# EAGLE board LilyPad-E-Sewing-Kit-Panel_v13_old (EAGLE 7.7.0), part 1 of 2
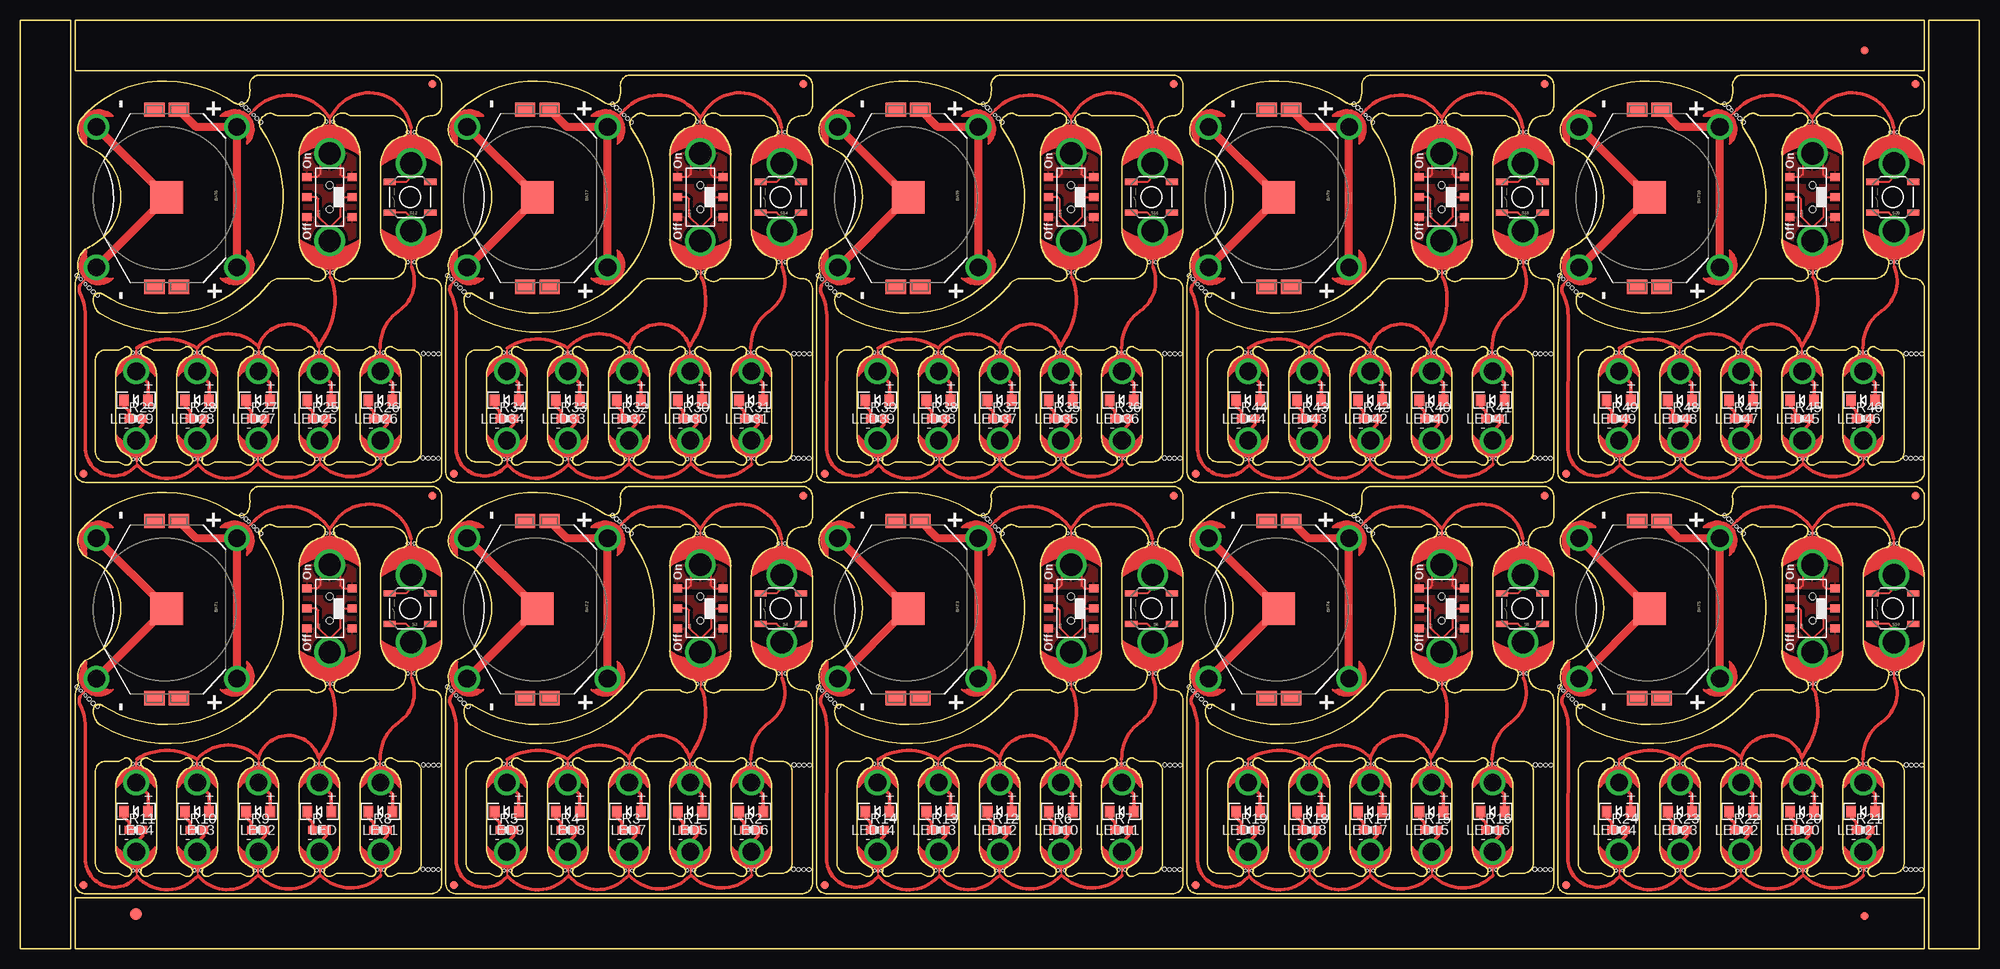
[diagram p0: board, top side]
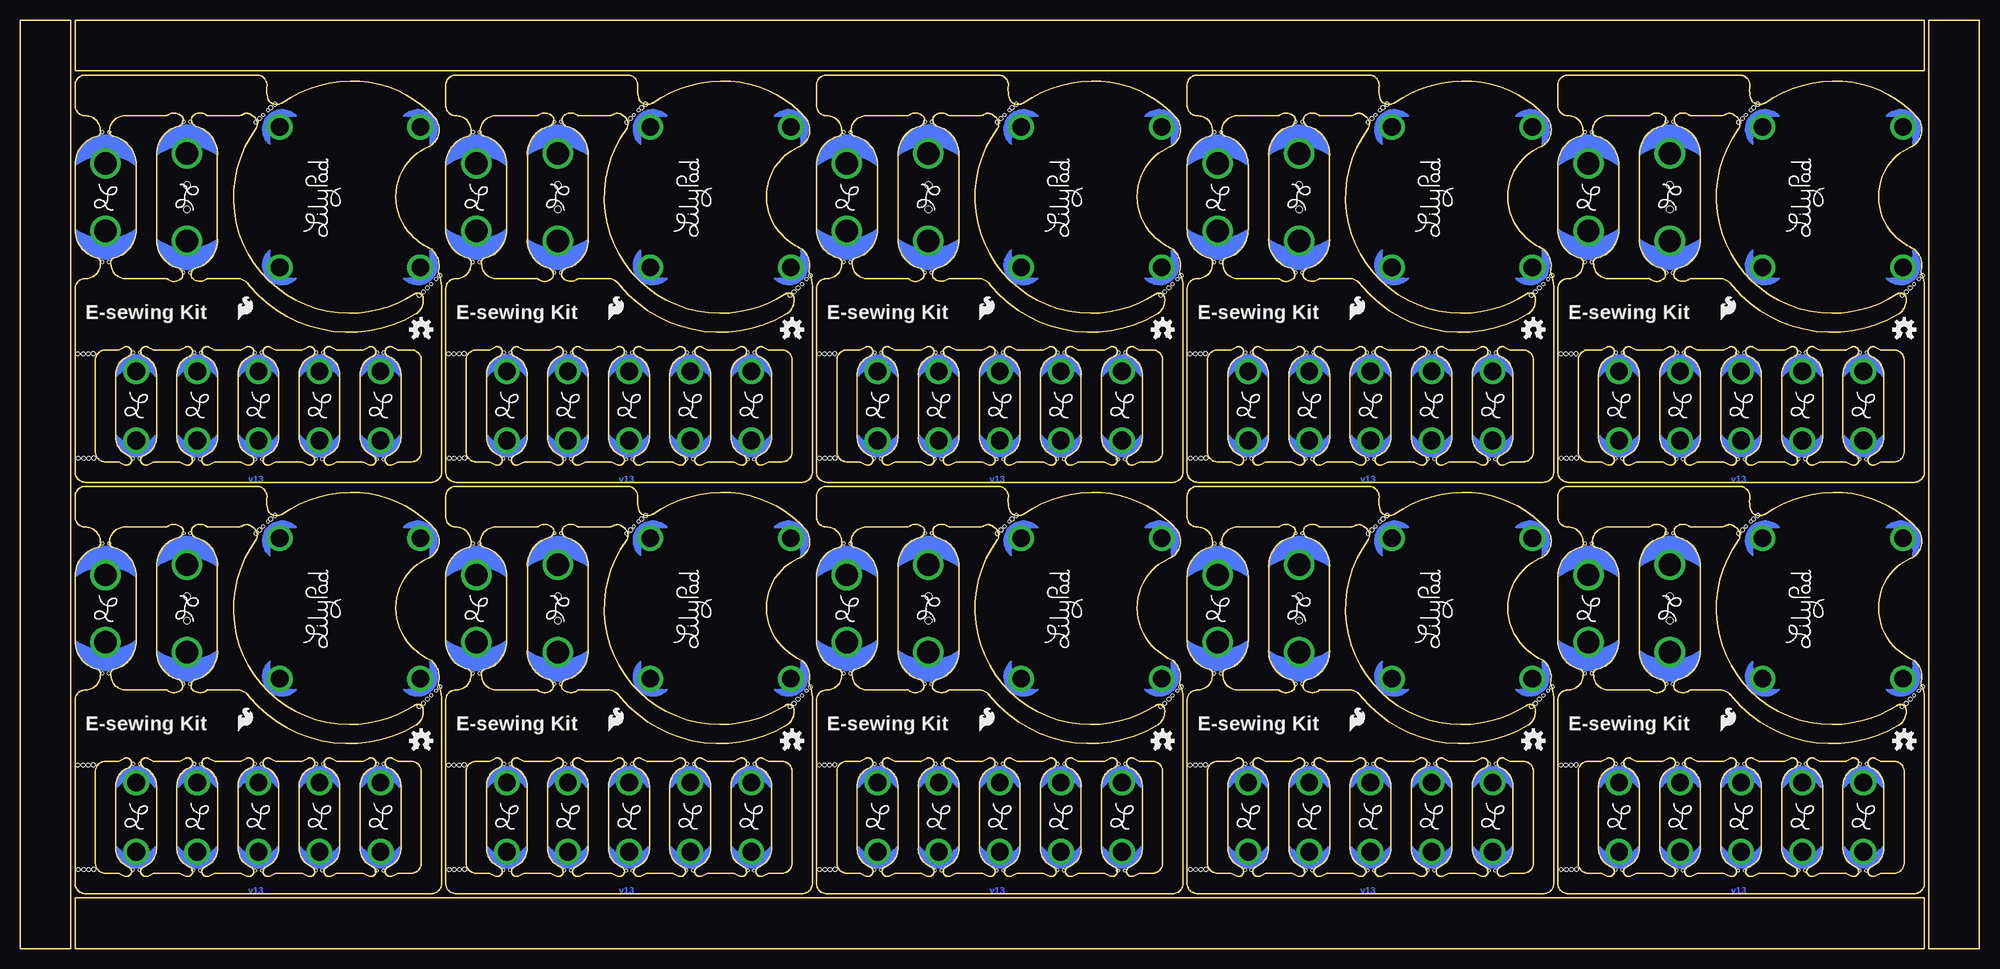
[diagram p1: board, bottom side, seen from below]

Size 244.35 x 115.82 mm. Coordinates in mm from the lower left corner, seen from the top.
Outline: 2613 segments
Copper layers (1*16): Top 0.035mm / dielectric 1.5mm / Bottom 0.035mm
Design rules "SparkFun *": minimum track width 6mil, minimum drill 15mil, track to track 8mil, track to pad 8mil, pad to pad 8mil, via to via 8mil, smd to smd 8mil, copper to edge 10mil, drill to drill 8mil, minimum pad ring 12mil, minimum via ring 10mil, stop-mask expansion 4mil, vias tented up to drill 20mil, thermal gap 10mil
Net classes: 1 VCC: width 0.203 mm
Holes 0.51 mm at 8.64,31.11 9.14,30.61 9.65,30.23 7.11,32.64 28.17,53.6 27.66,54.04 29.55,52.24 30,51.78 50.24,9.88 50.88,9.86 51.51,9.86 52.17,9.86 50.29,22.91 50.93,22.89 51.56,22.89 52.22,22.89 54.86,31.11 55.37,30.61 55.88,30.23 53.34,32.64 74.4,53.6 73.88,54.04 75.77,52.24 76.23,51.78 96.47,9.88 97.1,9.86 97.74,9.86 98.4,9.86 96.52,22.91 97.16,22.89 97.79,22.89 98.45,22.89 101.09,31.11 101.6,30.61 102.11,30.23 99.57,32.64 120.62,53.6 120.11,54.04 122,52.24 122.46,51.78 142.7,9.88 143.33,9.86 143.97,9.86 144.63,9.86 142.75,22.91 143.38,22.89 144.02,22.89 144.68,22.89 147.32,31.11 147.83,30.61 148.34,30.23 145.8,32.64 166.85,53.6 166.34,54.04 168.23,52.24 168.68,51.78 188.93,9.88 189.56,9.86 190.2,9.86 190.86,9.86 188.98,22.91 189.61,22.89 190.25,22.89 190.91,22.89 193.55,31.11 194.06,30.61 194.56,30.23 192.02,32.64 213.08,53.6 212.57,54.04 214.46,52.24 214.91,51.78 235.15,9.88 235.79,9.86 236.42,9.86 237.08,9.86 235.2,22.91 235.84,22.89 236.47,22.89 237.13,22.89 8.64,82.42 9.14,81.92 9.65,81.53 7.11,83.95 28.17,104.91 27.66,105.35 29.55,103.54 30,103.09 50.24,61.19 50.88,61.16 51.51,61.16 52.17,61.16 50.29,74.22 50.93,74.19 51.56,74.19 52.22,74.19 54.86,82.42 55.37,81.92 55.88,81.53 53.34,83.95 74.4,104.91 73.88,105.35 75.77,103.54 76.23,103.09 96.47,61.19 97.1,61.16 97.74,61.16 98.4,61.16 96.52,74.22 97.16,74.19 97.79,74.19 98.45,74.19 101.09,82.42 101.6,81.92 102.11,81.53 99.57,83.95 120.62,104.91 120.11,105.35 122,103.54 122.46,103.09 142.7,61.19 143.33,61.16 143.97,61.16 144.63,61.16 142.75,74.22 143.38,74.19 144.02,74.19 144.68,74.19 147.32,82.42 147.83,81.92 148.34,81.53 145.8,83.95 166.85,104.91 166.34,105.35 168.23,103.54 168.68,103.09 188.93,61.19 189.56,61.16 190.2,61.16 190.86,61.16 188.98,74.22 189.61,74.19 190.25,74.19 190.91,74.19 193.55,82.42 194.06,81.92 194.56,81.53 192.02,83.95 213.08,104.91 212.57,105.35 214.46,103.54 214.91,103.09 235.15,61.19 235.79,61.16 236.42,61.16 237.08,61.16 235.2,74.22 235.84,74.19 236.47,74.19 237.13,74.19

## Footprints (pad centres in the part's own frame; a part is rotated, then mirrored left to right if it is on the bottom)
BATTCON_20MM_4LEGS = smd 1.778 x 2.54: 1 -10.922,1.524; 3 11.176,1.524; P$1 -10.922,-1.524; P$2 11.176,-1.524 | smd 4.064 x 4.064: 2 0,0
PETAL-MEDIUM-2SIDE = drill 2.794: 1 0,-0.254
FIDUCIAL-1X2 = smd 1 x 1: 1 0,0
FIDUCIAL-1.5X3 = smd 1.5 x 1.5: 1 0,0
LED-1206 = smd 1.2 x 1.4: A -1.5,0; C 1.5,0
PETAL-SMALL-2SIDE = drill 2.2: 1 0,0
0603-RES = smd 1.1 x 1: 1 -0.85,0; 2 0.85,0
AYZ0202 = smd 1 x 1.15: 1 -2.5,2.825; 2 0,2.825; 3 2.5,2.825; 4 -2.5,-2.825; 5 0,-2.825; 6 2.5,-2.825 | hole 0.85: 1.5,0; -1.5,0
TACTILE_SWITCH_SMD = smd 1.524 x 0.762: 1 -2.54,1.905; 2 2.54,1.905; 3 -2.54,-1.905; 4 2.54,-1.905
MOUST-BITE-1-(2_HOLES) = smd 0.203 x 0.508 bottom: P$1 -0.013,0 | hole 0.381: -0.432,0; 0.406,0

## Placement (x,y rotation side)
BAT1  [BATTCON_20MM_4LEGS]  18.29,42.42 270 top
BAT2  [BATTCON_20MM_4LEGS]  64.52,42.42 270 top
BAT3  [BATTCON_20MM_4LEGS]  110.74,42.42 270 top
BAT4  [BATTCON_20MM_4LEGS]  156.97,42.42 270 top
BAT5  [BATTCON_20MM_4LEGS]  203.2,42.42 270 top
BAT6  [BATTCON_20MM_4LEGS]  18.29,93.73 270 top
BAT7  [BATTCON_20MM_4LEGS]  64.52,93.73 270 top
BAT8  [BATTCON_20MM_4LEGS]  110.74,93.73 270 top
BAT9  [BATTCON_20MM_4LEGS]  156.97,93.73 270 top
BAT10  [BATTCON_20MM_4LEGS]  203.2,93.73 270 top
BUTTON-  SEWTAP8  [PETAL-MEDIUM-2SIDE]  48.77,46.35 180 top
BUTTON-1  SEWTAP8  [PETAL-MEDIUM-2SIDE]  95,46.35 180 top
BUTTON-2  SEWTAP8  [PETAL-MEDIUM-2SIDE]  141.22,46.35 180 top
BUTTON-3  SEWTAP8  [PETAL-MEDIUM-2SIDE]  187.45,46.35 180 top
BUTTON-4  SEWTAP8  [PETAL-MEDIUM-2SIDE]  233.68,46.35 180 top
BUTTON-5  SEWTAP8  [PETAL-MEDIUM-2SIDE]  48.77,97.66 180 top
BUTTON-6  SEWTAP8  [PETAL-MEDIUM-2SIDE]  95,97.66 180 top
BUTTON-7  SEWTAP8  [PETAL-MEDIUM-2SIDE]  141.22,97.66 180 top
BUTTON-8  SEWTAP8  [PETAL-MEDIUM-2SIDE]  187.45,97.66 180 top
BUTTON-9  SEWTAP8  [PETAL-MEDIUM-2SIDE]  233.68,97.66 180 top
BUTTONS  SEWTAP8  [PETAL-MEDIUM-2SIDE]  48.77,38.48 0 top
BUTTONS1  SEWTAP8  [PETAL-MEDIUM-2SIDE]  95,38.48 0 top
BUTTONS2  SEWTAP8  [PETAL-MEDIUM-2SIDE]  141.22,38.48 0 top
BUTTONS3  SEWTAP8  [PETAL-MEDIUM-2SIDE]  187.45,38.48 0 top
BUTTONS4  SEWTAP8  [PETAL-MEDIUM-2SIDE]  233.68,38.48 0 top
BUTTONS5  SEWTAP8  [PETAL-MEDIUM-2SIDE]  48.77,89.79 0 top
BUTTONS6  SEWTAP8  [PETAL-MEDIUM-2SIDE]  95,89.79 0 top
BUTTONS7  SEWTAP8  [PETAL-MEDIUM-2SIDE]  141.22,89.79 0 top
BUTTONS8  SEWTAP8  [PETAL-MEDIUM-2SIDE]  187.45,89.79 0 top
BUTTONS9  SEWTAP8  [PETAL-MEDIUM-2SIDE]  233.68,89.79 0 top
E$1  [FIDUCIAL-1X2]  230,112.01 0 top
E$2  [FIDUCIAL-1.5X3]  14.48,4.32 0 top
E$8  [FIDUCIAL-1X2]  230,4.06 0 top
JP1  FIDUCIAL1X2  [FIDUCIAL-1X2]  51.44,56.52 0 top
JP2  LOGO-SFESK  [SFE-LOGO-FLAME]  32.26,27.18 0 bottom
JP3  FIDUCIAL1X2  [FIDUCIAL-1X2]  54.13,7.92 0 top
JP4  FIDUCIAL1X2  [FIDUCIAL-1X2]  7.9,7.92 0 top
JP5  FIDUCIAL1X2  [FIDUCIAL-1X2]  97.66,56.52 0 top
JP6  LOGO-SFESK  [SFE-LOGO-FLAME]  78.49,27.18 0 bottom
JP7  FIDUCIAL1X2  [FIDUCIAL-1X2]  100.36,7.92 0 top
JP8  FIDUCIAL1X2  [FIDUCIAL-1X2]  143.89,56.52 0 top
JP9  LOGO-SFESK  [SFE-LOGO-FLAME]  124.71,27.18 0 bottom
JP10  FIDUCIAL1X2  [FIDUCIAL-1X2]  146.58,7.92 0 top
JP11  FIDUCIAL1X2  [FIDUCIAL-1X2]  190.12,56.52 0 top
JP12  LOGO-SFESK  [SFE-LOGO-FLAME]  170.94,27.18 0 bottom
JP13  FIDUCIAL1X2  [FIDUCIAL-1X2]  192.81,7.92 0 top
JP14  FIDUCIAL1X2  [FIDUCIAL-1X2]  236.35,56.52 0 top
JP15  LOGO-SFESK  [SFE-LOGO-FLAME]  217.17,27.18 0 bottom
JP16  FIDUCIAL1X2  [FIDUCIAL-1X2]  7.9,59.23 0 top
JP17  FIDUCIAL1X2  [FIDUCIAL-1X2]  51.44,107.82 0 top
JP18  LOGO-SFESK  [SFE-LOGO-FLAME]  32.26,78.49 0 bottom
JP19  FIDUCIAL1X2  [FIDUCIAL-1X2]  54.13,59.23 0 top
JP20  FIDUCIAL1X2  [FIDUCIAL-1X2]  97.66,107.82 0 top
JP21  LOGO-SFESK  [SFE-LOGO-FLAME]  78.49,78.49 0 bottom
JP22  FIDUCIAL1X2  [FIDUCIAL-1X2]  100.36,59.23 0 top
JP23  FIDUCIAL1X2  [FIDUCIAL-1X2]  143.89,107.82 0 top
JP24  LOGO-SFESK  [SFE-LOGO-FLAME]  124.71,78.49 0 bottom
JP25  FIDUCIAL1X2  [FIDUCIAL-1X2]  146.58,59.23 0 top
JP26  FIDUCIAL1X2  [FIDUCIAL-1X2]  190.12,107.82 0 top
JP27  LOGO-SFESK  [SFE-LOGO-FLAME]  170.94,78.49 0 bottom
JP28  FIDUCIAL1X2  [FIDUCIAL-1X2]  192.81,59.23 0 top
JP29  FIDUCIAL1X2  [FIDUCIAL-1X2]  236.35,107.82 0 top
JP30  LOGO-SFESK  [SFE-LOGO-FLAME]  217.17,78.49 0 bottom
LED  White  [LED-1206]  37.32,17.09 180 top
LED1  White  [LED-1206]  44.94,17.09 180 top
LED2  White  [LED-1206]  29.7,17.09 180 top
LED3  White  [LED-1206]  22.08,17.09 180 top
LED4  White  [LED-1206]  14.46,17.09 180 top
LED5  White  [LED-1206]  83.55,17.09 180 top
LED6  White  [LED-1206]  91.17,17.09 180 top
LED7  White  [LED-1206]  75.93,17.09 180 top
LED8  White  [LED-1206]  68.31,17.09 180 top
LED9  White  [LED-1206]  60.69,17.09 180 top
LED10  White  [LED-1206]  129.77,17.09 180 top
LED11  White  [LED-1206]  137.39,17.09 180 top
LED12  White  [LED-1206]  122.15,17.09 180 top
LED13  White  [LED-1206]  114.53,17.09 180 top
LED14  White  [LED-1206]  106.91,17.09 180 top
LED15  White  [LED-1206]  176,17.09 180 top
LED16  White  [LED-1206]  183.62,17.09 180 top
LED17  White  [LED-1206]  168.38,17.09 180 top
LED18  White  [LED-1206]  160.76,17.09 180 top
LED19  White  [LED-1206]  153.14,17.09 180 top
LED20  White  [LED-1206]  222.23,17.09 180 top
LED21  White  [LED-1206]  229.85,17.09 180 top
LED22  White  [LED-1206]  214.61,17.09 180 top
LED23  White  [LED-1206]  206.99,17.09 180 top
LED24  White  [LED-1206]  199.37,17.09 180 top
LED25  White  [LED-1206]  37.32,68.4 180 top
LED26  White  [LED-1206]  44.94,68.4 180 top
LED27  White  [LED-1206]  29.7,68.4 180 top
LED28  White  [LED-1206]  22.08,68.4 180 top
LED29  White  [LED-1206]  14.46,68.4 180 top
LED30  White  [LED-1206]  83.55,68.4 180 top
LED31  White  [LED-1206]  91.17,68.4 180 top
LED32  White  [LED-1206]  75.93,68.4 180 top
LED33  White  [LED-1206]  68.31,68.4 180 top
LED34  White  [LED-1206]  60.69,68.4 180 top
LED35  White  [LED-1206]  129.77,68.4 180 top
LED36  White  [LED-1206]  137.39,68.4 180 top
LED37  White  [LED-1206]  122.15,68.4 180 top
LED38  White  [LED-1206]  114.53,68.4 180 top
LED39  White  [LED-1206]  106.91,68.4 180 top
LED40  White  [LED-1206]  176,68.4 180 top
LED41  White  [LED-1206]  183.62,68.4 180 top
LED42  White  [LED-1206]  168.38,68.4 180 top
LED43  White  [LED-1206]  160.76,68.4 180 top
LED44  White  [LED-1206]  153.14,68.4 180 top
LED45  White  [LED-1206]  222.23,68.4 180 top
LED46  White  [LED-1206]  229.85,68.4 180 top
LED47  White  [LED-1206]  214.61,68.4 180 top
LED48  White  [LED-1206]  206.99,68.4 180 top
LED49  White  [LED-1206]  199.37,68.4 180 top
LED+  SEWTAP6  [PETAL-SMALL-2SIDE]  37.34,20.7 180 top
LED+1  SEWTAP6  [PETAL-SMALL-2SIDE]  44.96,20.7 180 top
LED+2  SEWTAP6  [PETAL-SMALL-2SIDE]  29.72,20.7 180 top
LED+3  SEWTAP6  [PETAL-SMALL-2SIDE]  22.1,20.7 180 top
LED+4  SEWTAP6  [PETAL-SMALL-2SIDE]  14.48,20.7 180 top
LED+5  SEWTAP6  [PETAL-SMALL-2SIDE]  83.57,20.7 180 top
LED+6  SEWTAP6  [PETAL-SMALL-2SIDE]  91.19,20.7 180 top
LED+7  SEWTAP6  [PETAL-SMALL-2SIDE]  75.95,20.7 180 top
LED+8  SEWTAP6  [PETAL-SMALL-2SIDE]  68.33,20.7 180 top
LED+9  SEWTAP6  [PETAL-SMALL-2SIDE]  60.71,20.7 180 top
LED+10  SEWTAP6  [PETAL-SMALL-2SIDE]  129.79,20.7 180 top
LED+11  SEWTAP6  [PETAL-SMALL-2SIDE]  137.41,20.7 180 top
LED+12  SEWTAP6  [PETAL-SMALL-2SIDE]  122.17,20.7 180 top
LED+13  SEWTAP6  [PETAL-SMALL-2SIDE]  114.55,20.7 180 top
LED+14  SEWTAP6  [PETAL-SMALL-2SIDE]  106.93,20.7 180 top
LED+15  SEWTAP6  [PETAL-SMALL-2SIDE]  176.02,20.7 180 top
LED+16  SEWTAP6  [PETAL-SMALL-2SIDE]  183.64,20.7 180 top
LED+17  SEWTAP6  [PETAL-SMALL-2SIDE]  168.4,20.7 180 top
LED+18  SEWTAP6  [PETAL-SMALL-2SIDE]  160.78,20.7 180 top
LED+19  SEWTAP6  [PETAL-SMALL-2SIDE]  153.16,20.7 180 top
LED+20  SEWTAP6  [PETAL-SMALL-2SIDE]  222.25,20.7 180 top
LED+21  SEWTAP6  [PETAL-SMALL-2SIDE]  229.87,20.7 180 top
LED+22  SEWTAP6  [PETAL-SMALL-2SIDE]  214.63,20.7 180 top
LED+23  SEWTAP6  [PETAL-SMALL-2SIDE]  207.01,20.7 180 top
LED+24  SEWTAP6  [PETAL-SMALL-2SIDE]  199.39,20.7 180 top
LED+25  SEWTAP6  [PETAL-SMALL-2SIDE]  37.34,72.01 180 top
LED+26  SEWTAP6  [PETAL-SMALL-2SIDE]  44.96,72.01 180 top
LED+27  SEWTAP6  [PETAL-SMALL-2SIDE]  29.72,72.01 180 top
LED+28  SEWTAP6  [PETAL-SMALL-2SIDE]  22.1,72.01 180 top
LED+29  SEWTAP6  [PETAL-SMALL-2SIDE]  14.48,72.01 180 top
LED+30  SEWTAP6  [PETAL-SMALL-2SIDE]  83.57,72.01 180 top
LED+31  SEWTAP6  [PETAL-SMALL-2SIDE]  91.19,72.01 180 top
LED+32  SEWTAP6  [PETAL-SMALL-2SIDE]  75.95,72.01 180 top
LED+33  SEWTAP6  [PETAL-SMALL-2SIDE]  68.33,72.01 180 top
LED+34  SEWTAP6  [PETAL-SMALL-2SIDE]  60.71,72.01 180 top
LED+35  SEWTAP6  [PETAL-SMALL-2SIDE]  129.79,72.01 180 top
LED+36  SEWTAP6  [PETAL-SMALL-2SIDE]  137.41,72.01 180 top
LED+37  SEWTAP6  [PETAL-SMALL-2SIDE]  122.17,72.01 180 top
LED+38  SEWTAP6  [PETAL-SMALL-2SIDE]  114.55,72.01 180 top
LED+39  SEWTAP6  [PETAL-SMALL-2SIDE]  106.93,72.01 180 top
LED+40  SEWTAP6  [PETAL-SMALL-2SIDE]  176.02,72.01 180 top
LED+41  SEWTAP6  [PETAL-SMALL-2SIDE]  183.64,72.01 180 top
LED+42  SEWTAP6  [PETAL-SMALL-2SIDE]  168.4,72.01 180 top
LED+43  SEWTAP6  [PETAL-SMALL-2SIDE]  160.78,72.01 180 top
LED+44  SEWTAP6  [PETAL-SMALL-2SIDE]  153.16,72.01 180 top
LED+45  SEWTAP6  [PETAL-SMALL-2SIDE]  222.25,72.01 180 top
LED+46  SEWTAP6  [PETAL-SMALL-2SIDE]  229.87,72.01 180 top
LED+47  SEWTAP6  [PETAL-SMALL-2SIDE]  214.63,72.01 180 top
LED+48  SEWTAP6  [PETAL-SMALL-2SIDE]  207.01,72.01 180 top
LED+49  SEWTAP6  [PETAL-SMALL-2SIDE]  199.39,72.01 180 top
LED-  SEWTAP6  [PETAL-SMALL-2SIDE]  37.34,12.06 0 top
LED-1  SEWTAP6  [PETAL-SMALL-2SIDE]  44.96,12.06 0 top
LED-2  SEWTAP6  [PETAL-SMALL-2SIDE]  29.72,12.06 0 top
LED-3  SEWTAP6  [PETAL-SMALL-2SIDE]  22.1,12.06 0 top
LED-4  SEWTAP6  [PETAL-SMALL-2SIDE]  14.48,12.06 0 top
LED-5  SEWTAP6  [PETAL-SMALL-2SIDE]  83.57,12.06 0 top
LED-6  SEWTAP6  [PETAL-SMALL-2SIDE]  91.19,12.06 0 top
LED-7  SEWTAP6  [PETAL-SMALL-2SIDE]  75.95,12.06 0 top
LED-8  SEWTAP6  [PETAL-SMALL-2SIDE]  68.33,12.06 0 top
LED-9  SEWTAP6  [PETAL-SMALL-2SIDE]  60.71,12.06 0 top
LED-10  SEWTAP6  [PETAL-SMALL-2SIDE]  129.79,12.06 0 top
LED-11  SEWTAP6  [PETAL-SMALL-2SIDE]  137.41,12.06 0 top
LED-12  SEWTAP6  [PETAL-SMALL-2SIDE]  122.17,12.06 0 top
LED-13  SEWTAP6  [PETAL-SMALL-2SIDE]  114.55,12.06 0 top
LED-14  SEWTAP6  [PETAL-SMALL-2SIDE]  106.93,12.06 0 top
LED-15  SEWTAP6  [PETAL-SMALL-2SIDE]  176.02,12.06 0 top
LED-16  SEWTAP6  [PETAL-SMALL-2SIDE]  183.64,12.06 0 top
LED-17  SEWTAP6  [PETAL-SMALL-2SIDE]  168.4,12.06 0 top
LED-18  SEWTAP6  [PETAL-SMALL-2SIDE]  160.78,12.06 0 top
LED-19  SEWTAP6  [PETAL-SMALL-2SIDE]  153.16,12.06 0 top
LED-20  SEWTAP6  [PETAL-SMALL-2SIDE]  222.25,12.06 0 top
LED-21  SEWTAP6  [PETAL-SMALL-2SIDE]  229.87,12.06 0 top
LED-22  SEWTAP6  [PETAL-SMALL-2SIDE]  214.63,12.06 0 top
LED-23  SEWTAP6  [PETAL-SMALL-2SIDE]  207.01,12.06 0 top
LED-24  SEWTAP6  [PETAL-SMALL-2SIDE]  199.39,12.06 0 top
LED-25  SEWTAP6  [PETAL-SMALL-2SIDE]  37.34,63.37 0 top
LED-26  SEWTAP6  [PETAL-SMALL-2SIDE]  44.96,63.37 0 top
LED-27  SEWTAP6  [PETAL-SMALL-2SIDE]  29.72,63.37 0 top
LED-28  SEWTAP6  [PETAL-SMALL-2SIDE]  22.1,63.37 0 top
LED-29  SEWTAP6  [PETAL-SMALL-2SIDE]  14.48,63.37 0 top
LED-30  SEWTAP6  [PETAL-SMALL-2SIDE]  83.57,63.37 0 top
LED-31  SEWTAP6  [PETAL-SMALL-2SIDE]  91.19,63.37 0 top
LED-32  SEWTAP6  [PETAL-SMALL-2SIDE]  75.95,63.37 0 top
LED-33  SEWTAP6  [PETAL-SMALL-2SIDE]  68.33,63.37 0 top
LED-34  SEWTAP6  [PETAL-SMALL-2SIDE]  60.71,63.37 0 top
LED-35  SEWTAP6  [PETAL-SMALL-2SIDE]  129.79,63.37 0 top
LED-36  SEWTAP6  [PETAL-SMALL-2SIDE]  137.41,63.37 0 top
LED-37  SEWTAP6  [PETAL-SMALL-2SIDE]  122.17,63.37 0 top
LED-38  SEWTAP6  [PETAL-SMALL-2SIDE]  114.55,63.37 0 top
LED-39  SEWTAP6  [PETAL-SMALL-2SIDE]  106.93,63.37 0 top
LED-40  SEWTAP6  [PETAL-SMALL-2SIDE]  176.02,63.37 0 top
LED-41  SEWTAP6  [PETAL-SMALL-2SIDE]  183.64,63.37 0 top
LED-42  SEWTAP6  [PETAL-SMALL-2SIDE]  168.4,63.37 0 top
LED-43  SEWTAP6  [PETAL-SMALL-2SIDE]  160.78,63.37 0 top
LED-44  SEWTAP6  [PETAL-SMALL-2SIDE]  153.16,63.37 0 top
LED-45  SEWTAP6  [PETAL-SMALL-2SIDE]  222.25,63.37 0 top
LED-46  SEWTAP6  [PETAL-SMALL-2SIDE]  229.87,63.37 0 top
LED-47  SEWTAP6  [PETAL-SMALL-2SIDE]  214.63,63.37 0 top
LED-48  SEWTAP6  [PETAL-SMALL-2SIDE]  207.01,63.37 0 top
LED-49  SEWTAP6  [PETAL-SMALL-2SIDE]  199.39,63.37 0 top
LOGO1  LOGO-LPL  [LOGO-L]  38.61,42.42 180 bottom
LOGO2  LOGO-LPL  [LOGO-L]  48.77,42.42 0 bottom
LOGO3  LOGO-LPL  [LOGO-L]  29.72,16.51 0 bottom
LOGO4  LOGO-LPL  [LOGO-L]  37.34,16.51 0 bottom
LOGO5  LOGO-LPL  [LOGO-L]  22.1,16.51 0 bottom
LOGO6  LOGO-LPL  [LOGO-L]  14.48,16.51 0 bottom
LOGO7  LOGO-LPL  [LOGO-L]  44.96,16.51 0 bottom
LOGO8  LOGO-LPL  [LOGO-L]  84.84,42.42 180 bottom
LOGO9  LOGO-LPL  [LOGO-L]  95,42.42 0 bottom
LOGO10  LOGO-LPL  [LOGO-L]  75.95,16.51 0 bottom
LOGO11  LOGO-LPL  [LOGO-L]  83.57,16.51 0 bottom
LOGO12  LOGO-LPL  [LOGO-L]  68.33,16.51 0 bottom
LOGO13  LOGO-LPL  [LOGO-L]  60.71,16.51 0 bottom
LOGO14  LOGO-LPL  [LOGO-L]  91.19,16.51 0 bottom
LOGO15  LOGO-LPL  [LOGO-L]  131.06,42.42 180 bottom
LOGO16  LOGO-LPL  [LOGO-L]  141.22,42.42 0 bottom
LOGO17  LOGO-LPL  [LOGO-L]  122.17,16.51 0 bottom
LOGO18  LOGO-LPL  [LOGO-L]  129.79,16.51 0 bottom
LOGO19  LOGO-LPL  [LOGO-L]  114.55,16.51 0 bottom
LOGO20  LOGO-LPL  [LOGO-L]  106.93,16.51 0 bottom
LOGO21  LOGO-LPL  [LOGO-L]  137.41,16.51 0 bottom
LOGO22  LOGO-LPL  [LOGO-L]  177.29,42.42 180 bottom
LOGO23  LOGO-LPL  [LOGO-L]  187.45,42.42 0 bottom
LOGO24  LOGO-LPL  [LOGO-L]  168.4,16.51 0 bottom
LOGO25  LOGO-LPL  [LOGO-L]  176.02,16.51 0 bottom
LOGO26  LOGO-LPL  [LOGO-L]  160.78,16.51 0 bottom
LOGO27  LOGO-LPL  [LOGO-L]  153.16,16.51 0 bottom
LOGO28  LOGO-LPL  [LOGO-L]  183.64,16.51 0 bottom
LOGO29  LOGO-LPL  [LOGO-L]  223.52,42.42 180 bottom
LOGO30  LOGO-LPL  [LOGO-L]  233.68,42.42 0 bottom
LOGO31  LOGO-LPL  [LOGO-L]  214.63,16.51 0 bottom
LOGO32  LOGO-LPL  [LOGO-L]  222.25,16.51 0 bottom
LOGO33  LOGO-LPL  [LOGO-L]  207.01,16.51 0 bottom
LOGO34  LOGO-LPL  [LOGO-L]  199.39,16.51 0 bottom
LOGO35  LOGO-LPL  [LOGO-L]  229.87,16.51 0 bottom
LOGO36  LOGO-LPL  [LOGO-L]  38.61,93.73 180 bottom
LOGO37  LOGO-LPL  [LOGO-L]  48.77,93.73 0 bottom
LOGO38  LOGO-LPL  [LOGO-L]  29.72,67.82 0 bottom
LOGO39  LOGO-LPL  [LOGO-L]  37.34,67.82 0 bottom
LOGO40  LOGO-LPL  [LOGO-L]  22.1,67.82 0 bottom
LOGO41  LOGO-LPL  [LOGO-L]  14.48,67.82 0 bottom
LOGO42  LOGO-LPL  [LOGO-L]  44.96,67.82 0 bottom
LOGO43  LOGO-LPL  [LOGO-L]  84.84,93.73 180 bottom
LOGO44  LOGO-LPL  [LOGO-L]  95,93.73 0 bottom
LOGO45  LOGO-LPL  [LOGO-L]  75.95,67.82 0 bottom
LOGO46  LOGO-LPL  [LOGO-L]  83.57,67.82 0 bottom
LOGO47  LOGO-LPL  [LOGO-L]  68.33,67.82 0 bottom
LOGO48  LOGO-LPL  [LOGO-L]  60.71,67.82 0 bottom
LOGO49  LOGO-LPL  [LOGO-L]  91.19,67.82 0 bottom
LOGO50  LOGO-LPL  [LOGO-L]  131.06,93.73 180 bottom
LOGO51  LOGO-LPL  [LOGO-L]  141.22,93.73 0 bottom
LOGO52  LOGO-LPL  [LOGO-L]  122.17,67.82 0 bottom
LOGO53  LOGO-LPL  [LOGO-L]  129.79,67.82 0 bottom
LOGO54  LOGO-LPL  [LOGO-L]  114.55,67.82 0 bottom
LOGO55  LOGO-LPL  [LOGO-L]  106.93,67.82 0 bottom
LOGO56  LOGO-LPL  [LOGO-L]  137.41,67.82 0 bottom
LOGO57  LOGO-LPL  [LOGO-L]  177.29,93.73 180 bottom
LOGO58  LOGO-LPL  [LOGO-L]  187.45,93.73 0 bottom
LOGO59  LOGO-LPL  [LOGO-L]  168.4,67.82 0 bottom
LOGO60  LOGO-LPL  [LOGO-L]  176.02,67.82 0 bottom
LOGO61  LOGO-LPL  [LOGO-L]  160.78,67.82 0 bottom
LOGO62  LOGO-LPL  [LOGO-L]  153.16,67.82 0 bottom
LOGO63  LOGO-LPL  [LOGO-L]  183.64,67.82 0 bottom
LOGO64  LOGO-LPL  [LOGO-L]  223.52,93.73 180 bottom
LOGO65  LOGO-LPL  [LOGO-L]  233.68,93.73 0 bottom
LOGO66  LOGO-LPL  [LOGO-L]  214.63,67.82 0 bottom
LOGO67  LOGO-LPL  [LOGO-L]  222.25,67.82 0 bottom
LOGO68  LOGO-LPL  [LOGO-L]  207.01,67.82 0 bottom
LOGO69  LOGO-LPL  [LOGO-L]  199.39,67.82 0 bottom
LOGO70  LOGO-LPL  [LOGO-L]  229.87,67.82 0 bottom
R  100  [0603-RES]  37.32,14.81 0 top
R1  100  [0603-RES]  83.55,14.81 0 top
R2  100  [0603-RES]  91.17,14.81 0 top
R3  100  [0603-RES]  75.93,14.81 0 top
R4  100  [0603-RES]  68.31,14.81 0 top
R5  100  [0603-RES]  60.69,14.81 0 top
R6  100  [0603-RES]  129.77,14.81 0 top
R7  100  [0603-RES]  137.39,14.81 0 top
R8  100  [0603-RES]  44.94,14.81 0 top
R9  100  [0603-RES]  29.7,14.81 0 top
R10  100  [0603-RES]  22.08,14.81 0 top
R11  100  [0603-RES]  14.46,14.81 0 top
R12  100  [0603-RES]  122.15,14.81 0 top
R13  100  [0603-RES]  114.53,14.81 0 top
R14  100  [0603-RES]  106.91,14.81 0 top
R15  100  [0603-RES]  176,14.81 0 top
R16  100  [0603-RES]  183.62,14.81 0 top
R17  100  [0603-RES]  168.38,14.81 0 top
R18  100  [0603-RES]  160.76,14.81 0 top
R19  100  [0603-RES]  153.14,14.81 0 top
R20  100  [0603-RES]  222.23,14.81 0 top
R21  100  [0603-RES]  229.85,14.81 0 top
R22  100  [0603-RES]  214.61,14.81 0 top
R23  100  [0603-RES]  206.99,14.81 0 top
R24  100  [0603-RES]  199.37,14.81 0 top
R25  100  [0603-RES]  37.32,66.12 0 top
R26  100  [0603-RES]  44.94,66.12 0 top
R27  100  [0603-RES]  29.7,66.12 0 top
R28  100  [0603-RES]  22.08,66.12 0 top
R29  100  [0603-RES]  14.46,66.12 0 top
R30  100  [0603-RES]  83.55,66.12 0 top
R31  100  [0603-RES]  91.17,66.12 0 top
R32  100  [0603-RES]  75.93,66.12 0 top
R33  100  [0603-RES]  68.31,66.12 0 top
R34  100  [0603-RES]  60.69,66.12 0 top
R35  100  [0603-RES]  129.77,66.12 0 top
R36  100  [0603-RES]  137.39,66.12 0 top
R37  100  [0603-RES]  122.15,66.12 0 top
R38  100  [0603-RES]  114.53,66.12 0 top
R39  100  [0603-RES]  106.91,66.12 0 top
R40  100  [0603-RES]  176,66.12 0 top
R41  100  [0603-RES]  183.62,66.12 0 top
R42  100  [0603-RES]  168.38,66.12 0 top
R43  100  [0603-RES]  160.76,66.12 0 top
R44  100  [0603-RES]  153.14,66.12 0 top
R45  100  [0603-RES]  222.23,66.12 0 top
R46  100  [0603-RES]  229.85,66.12 0 top
R47  100  [0603-RES]  214.61,66.12 0 top
R48  100  [0603-RES]  206.99,66.12 0 top
R49  100  [0603-RES]  199.37,66.12 0 top
S1  AYZ0202  [AYZ0202]  84.84,42.42 90 top
S2  AYZ0202  [AYZ0202]  38.61,42.42 90 top
S3  [TACTILE_SWITCH_SMD]  48.64,42.42 180 top
S4  [TACTILE_SWITCH_SMD]  94.87,42.42 180 top
S5  AYZ0202  [AYZ0202]  131.06,42.42 90 top
S6  [TACTILE_SWITCH_SMD]  141.1,42.42 180 top
S7  AYZ0202  [AYZ0202]  177.29,42.42 90 top
S8  [TACTILE_SWITCH_SMD]  187.32,42.42 180 top
S9  AYZ0202  [AYZ0202]  223.52,42.42 90 top
S10  [TACTILE_SWITCH_SMD]  233.55,42.42 180 top
S11  AYZ0202  [AYZ0202]  38.61,93.73 90 top
S12  [TACTILE_SWITCH_SMD]  48.64,93.73 180 top
S13  AYZ0202  [AYZ0202]  84.84,93.73 90 top
S14  [TACTILE_SWITCH_SMD]  94.87,93.73 180 top
S15  AYZ0202  [AYZ0202]  131.06,93.73 90 top
S16  [TACTILE_SWITCH_SMD]  141.1,93.73 180 top
S17  AYZ0202  [AYZ0202]  177.29,93.73 90 top
S18  [TACTILE_SWITCH_SMD]  187.32,93.73 180 top
S19  AYZ0202  [AYZ0202]  223.52,93.73 90 top
S20  [TACTILE_SWITCH_SMD]  233.55,93.73 180 top
SLIDEOFF  SEWTAP8  [PETAL-MEDIUM-2SIDE]  38.61,37.21 0 top
SLIDEOFF1  SEWTAP8  [PETAL-MEDIUM-2SIDE]  84.84,37.21 0 top
SLIDEOFF2  SEWTAP8  [PETAL-MEDIUM-2SIDE]  131.06,37.21 0 top
SLIDEOFF3  SEWTAP8  [PETAL-MEDIUM-2SIDE]  177.29,37.21 0 top
SLIDEOFF4  SEWTAP8  [PETAL-MEDIUM-2SIDE]  223.52,37.21 0 top
SLIDEOFF5  SEWTAP8  [PETAL-MEDIUM-2SIDE]  38.61,88.52 0 top
SLIDEOFF6  SEWTAP8  [PETAL-MEDIUM-2SIDE]  84.84,88.52 0 top
SLIDEOFF7  SEWTAP8  [PETAL-MEDIUM-2SIDE]  131.06,88.52 0 top
SLIDEOFF8  SEWTAP8  [PETAL-MEDIUM-2SIDE]  177.29,88.52 0 top
SLIDEOFF9  SEWTAP8  [PETAL-MEDIUM-2SIDE]  223.52,88.52 0 top
SLIDEON  SEWTAP8  [PETAL-MEDIUM-2SIDE]  38.61,47.62 180 top
SLIDEON1  SEWTAP8  [PETAL-MEDIUM-2SIDE]  84.84,47.62 180 top
SLIDEON2  SEWTAP8  [PETAL-MEDIUM-2SIDE]  131.06,47.62 180 top
SLIDEON3  SEWTAP8  [PETAL-MEDIUM-2SIDE]  177.29,47.62 180 top
SLIDEON4  SEWTAP8  [PETAL-MEDIUM-2SIDE]  223.52,47.62 180 top
SLIDEON5  SEWTAP8  [PETAL-MEDIUM-2SIDE]  38.61,98.93 180 top
SLIDEON6  SEWTAP8  [PETAL-MEDIUM-2SIDE]  84.84,98.93 180 top
SLIDEON7  SEWTAP8  [PETAL-MEDIUM-2SIDE]  131.06,98.93 180 top
SLIDEON8  SEWTAP8  [PETAL-MEDIUM-2SIDE]  177.29,98.93 180 top
SLIDEON9  SEWTAP8  [PETAL-MEDIUM-2SIDE]  223.52,98.93 180 top
U$1  SEWTAP6  [PETAL-SMALL-2SIDE]  9.53,51.18 227 top
U$2  SEWTAP6  [PETAL-SMALL-2SIDE]  27.05,51.18 133 top
U$3  SEWTAP6  [PETAL-SMALL-2SIDE]  9.53,33.66 313 top
U$4  SEWTAP6  [PETAL-SMALL-2SIDE]  27.05,33.66 47 top
U$5  LOGO-LPLP  [LOGO-LILYPAD]  22.1,42.42 90 bottom
U$6  MOUSE-BITE-12_HOLES  [MOUST-BITE-1-(2_HOLES)]  28.83,52.96 225 bottom
U$7  MOUSE-BITE-12_HOLES  [MOUST-BITE-1-(2_HOLES)]  7.87,31.88 225 bottom
U$8  OSHW-LOGOS  [OSHW-LOGO-S]  9.4,25.91 0 bottom
U$9  MOUSE-BITE-12_HOLES  [MOUST-BITE-1-(2_HOLES)]  60.71,23.04 0 bottom
U$10  MOUSE-BITE-12_HOLES  [MOUST-BITE-1-(2_HOLES)]  14.48,23.04 0 bottom
U$11  MOUSE-BITE-12_HOLES  [MOUST-BITE-1-(2_HOLES)]  22.07,23.04 180 bottom
U$12  MOUSE-BITE-12_HOLES  [MOUST-BITE-1-(2_HOLES)]  29.77,23.04 180 bottom
U$13  MOUSE-BITE-12_HOLES  [MOUST-BITE-1-(2_HOLES)]  44.91,23.04 180 bottom
U$14  MOUSE-BITE-12_HOLES  [MOUST-BITE-1-(2_HOLES)]  37.29,23.04 180 bottom
U$15  MOUSE-BITE-12_HOLES  [MOUST-BITE-1-(2_HOLES)]  14.53,9.73 0 bottom
U$16  MOUSE-BITE-12_HOLES  [MOUST-BITE-1-(2_HOLES)]  22.15,9.75 0 bottom
U$17  MOUSE-BITE-12_HOLES  [MOUST-BITE-1-(2_HOLES)]  29.67,9.73 0 bottom
U$18  MOUSE-BITE-12_HOLES  [MOUST-BITE-1-(2_HOLES)]  44.96,9.8 0 bottom
U$19  MOUSE-BITE-12_HOLES  [MOUST-BITE-1-(2_HOLES)]  37.39,9.75 0 bottom
U$20  MOUSE-BITE-12_HOLES  [MOUST-BITE-1-(2_HOLES)]  68.3,23.04 180 bottom
U$21  MOUSE-BITE-12_HOLES  [MOUST-BITE-1-(2_HOLES)]  76,23.04 180 bottom
U$22  MOUSE-BITE-12_HOLES  [MOUST-BITE-1-(2_HOLES)]  91.14,23.04 180 bottom
U$23  MOUSE-BITE-12_HOLES  [MOUST-BITE-1-(2_HOLES)]  83.52,23.04 180 bottom
U$24  MOUSE-BITE-12_HOLES  [MOUST-BITE-1-(2_HOLES)]  60.76,9.73 0 bottom
U$25  MOUSE-BITE-12_HOLES  [MOUST-BITE-1-(2_HOLES)]  68.38,9.75 0 bottom
U$26  MOUSE-BITE-12_HOLES  [MOUST-BITE-1-(2_HOLES)]  75.9,9.73 0 bottom
U$27  MOUSE-BITE-12_HOLES  [MOUST-BITE-1-(2_HOLES)]  91.19,9.8 0 bottom
U$28  MOUSE-BITE-12_HOLES  [MOUST-BITE-1-(2_HOLES)]  83.62,9.75 0 bottom
U$29  MOUSE-BITE-12_HOLES  [MOUST-BITE-1-(2_HOLES)]  95,50.52 180 bottom
U$30  MOUSE-BITE-12_HOLES  [MOUST-BITE-1-(2_HOLES)]  95,34.32 0 bottom
U$31  MOUSE-BITE-12_HOLES  [MOUST-BITE-1-(2_HOLES)]  84.86,33.02 0 bottom
U$32  MOUSE-BITE-12_HOLES  [MOUST-BITE-1-(2_HOLES)]  84.86,51.82 180 bottom
U$33  SEWTAP6  [PETAL-SMALL-2SIDE]  55.75,51.18 227 top
U$34  SEWTAP6  [PETAL-SMALL-2SIDE]  73.28,51.18 133 top
U$35  SEWTAP6  [PETAL-SMALL-2SIDE]  55.75,33.66 313 top
U$36  SEWTAP6  [PETAL-SMALL-2SIDE]  73.28,33.66 47 top
U$37  LOGO-LPLP  [LOGO-LILYPAD]  68.33,42.42 90 bottom
U$38  MOUSE-BITE-12_HOLES  [MOUST-BITE-1-(2_HOLES)]  75.06,52.96 225 bottom
U$39  MOUSE-BITE-12_HOLES  [MOUST-BITE-1-(2_HOLES)]  54.1,31.88 225 bottom
U$40  MOUSE-BITE-12_HOLES  [MOUST-BITE-1-(2_HOLES)]  48.77,50.52 180 bottom
U$41  OSHW-LOGOS  [OSHW-LOGO-S]  55.63,25.91 0 bottom
U$42  MOUSE-BITE-12_HOLES  [MOUST-BITE-1-(2_HOLES)]  48.77,34.32 0 bottom
U$43  MOUSE-BITE-12_HOLES  [MOUST-BITE-1-(2_HOLES)]  106.93,23.04 0 bottom
U$44  MOUSE-BITE-12_HOLES  [MOUST-BITE-1-(2_HOLES)]  38.63,33.02 0 bottom
U$45  MOUSE-BITE-12_HOLES  [MOUST-BITE-1-(2_HOLES)]  114.53,23.04 180 bottom
U$46  MOUSE-BITE-12_HOLES  [MOUST-BITE-1-(2_HOLES)]  38.63,51.82 180 bottom
U$47  MOUSE-BITE-12_HOLES  [MOUST-BITE-1-(2_HOLES)]  122.22,23.04 180 bottom
U$48  MOUSE-BITE-12_HOLES  [MOUST-BITE-1-(2_HOLES)]  137.36,23.04 180 bottom
U$49  MOUSE-BITE-12_HOLES  [MOUST-BITE-1-(2_HOLES)]  129.74,23.04 180 bottom
U$50  MOUSE-BITE-12_HOLES  [MOUST-BITE-1-(2_HOLES)]  106.98,9.73 0 bottom
U$51  MOUSE-BITE-12_HOLES  [MOUST-BITE-1-(2_HOLES)]  114.6,9.75 0 bottom
U$52  MOUSE-BITE-12_HOLES  [MOUST-BITE-1-(2_HOLES)]  122.12,9.73 0 bottom
U$53  MOUSE-BITE-12_HOLES  [MOUST-BITE-1-(2_HOLES)]  137.41,9.8 0 bottom
U$54  MOUSE-BITE-12_HOLES  [MOUST-BITE-1-(2_HOLES)]  129.84,9.75 0 bottom
U$55  MOUSE-BITE-12_HOLES  [MOUST-BITE-1-(2_HOLES)]  141.22,50.52 180 bottom
U$56  MOUSE-BITE-12_HOLES  [MOUST-BITE-1-(2_HOLES)]  141.22,34.32 0 bottom
U$57  MOUSE-BITE-12_HOLES  [MOUST-BITE-1-(2_HOLES)]  131.09,33.02 0 bottom
U$58  MOUSE-BITE-12_HOLES  [MOUST-BITE-1-(2_HOLES)]  131.09,51.82 180 bottom
U$59  SEWTAP6  [PETAL-SMALL-2SIDE]  101.98,51.18 227 top
U$60  SEWTAP6  [PETAL-SMALL-2SIDE]  119.51,51.18 133 top
U$61  SEWTAP6  [PETAL-SMALL-2SIDE]  101.98,33.66 313 top
U$62  SEWTAP6  [PETAL-SMALL-2SIDE]  119.51,33.66 47 top
U$63  LOGO-LPLP  [LOGO-LILYPAD]  114.55,42.42 90 bottom
U$64  MOUSE-BITE-12_HOLES  [MOUST-BITE-1-(2_HOLES)]  121.28,52.96 225 bottom
U$65  MOUSE-BITE-12_HOLES  [MOUST-BITE-1-(2_HOLES)]  100.33,31.88 225 bottom
U$66  OSHW-LOGOS  [OSHW-LOGO-S]  101.85,25.91 0 bottom
U$67  MOUSE-BITE-12_HOLES  [MOUST-BITE-1-(2_HOLES)]  153.16,23.04 0 bottom
U$68  MOUSE-BITE-12_HOLES  [MOUST-BITE-1-(2_HOLES)]  160.76,23.04 180 bottom
U$69  MOUSE-BITE-12_HOLES  [MOUST-BITE-1-(2_HOLES)]  168.45,23.04 180 bottom
U$70  MOUSE-BITE-12_HOLES  [MOUST-BITE-1-(2_HOLES)]  183.59,23.04 180 bottom
U$71  MOUSE-BITE-12_HOLES  [MOUST-BITE-1-(2_HOLES)]  175.97,23.04 180 bottom
U$72  MOUSE-BITE-12_HOLES  [MOUST-BITE-1-(2_HOLES)]  153.21,9.73 0 bottom
U$73  MOUSE-BITE-12_HOLES  [MOUST-BITE-1-(2_HOLES)]  160.83,9.75 0 bottom
U$74  MOUSE-BITE-12_HOLES  [MOUST-BITE-1-(2_HOLES)]  168.35,9.73 0 bottom
U$75  MOUSE-BITE-12_HOLES  [MOUST-BITE-1-(2_HOLES)]  183.64,9.8 0 bottom
U$76  MOUSE-BITE-12_HOLES  [MOUST-BITE-1-(2_HOLES)]  176.07,9.75 0 bottom
U$77  MOUSE-BITE-12_HOLES  [MOUST-BITE-1-(2_HOLES)]  187.45,50.52 180 bottom
U$78  MOUSE-BITE-12_HOLES  [MOUST-BITE-1-(2_HOLES)]  187.45,34.32 0 bottom
U$79  MOUSE-BITE-12_HOLES  [MOUST-BITE-1-(2_HOLES)]  177.32,33.02 0 bottom
U$80  MOUSE-BITE-12_HOLES  [MOUST-BITE-1-(2_HOLES)]  177.32,51.82 180 bottom
U$81  SEWTAP6  [PETAL-SMALL-2SIDE]  148.21,51.18 227 top
U$82  SEWTAP6  [PETAL-SMALL-2SIDE]  165.74,51.18 133 top
U$83  SEWTAP6  [PETAL-SMALL-2SIDE]  148.21,33.66 313 top
U$84  SEWTAP6  [PETAL-SMALL-2SIDE]  165.74,33.66 47 top
U$85  LOGO-LPLP  [LOGO-LILYPAD]  160.78,42.42 90 bottom
U$86  MOUSE-BITE-12_HOLES  [MOUST-BITE-1-(2_HOLES)]  167.51,52.96 225 bottom
U$87  MOUSE-BITE-12_HOLES  [MOUST-BITE-1-(2_HOLES)]  146.56,31.88 225 bottom
U$88  OSHW-LOGOS  [OSHW-LOGO-S]  148.08,25.91 0 bottom
U$89  MOUSE-BITE-12_HOLES  [MOUST-BITE-1-(2_HOLES)]  199.39,23.04 0 bottom
U$90  MOUSE-BITE-12_HOLES  [MOUST-BITE-1-(2_HOLES)]  206.98,23.04 180 bottom
U$91  MOUSE-BITE-12_HOLES  [MOUST-BITE-1-(2_HOLES)]  214.68,23.04 180 bottom
U$92  MOUSE-BITE-12_HOLES  [MOUST-BITE-1-(2_HOLES)]  229.82,23.04 180 bottom
U$93  MOUSE-BITE-12_HOLES  [MOUST-BITE-1-(2_HOLES)]  222.2,23.04 180 bottom
U$94  MOUSE-BITE-12_HOLES  [MOUST-BITE-1-(2_HOLES)]  199.44,9.73 0 bottom
U$95  MOUSE-BITE-12_HOLES  [MOUST-BITE-1-(2_HOLES)]  207.06,9.75 0 bottom
U$96  MOUSE-BITE-12_HOLES  [MOUST-BITE-1-(2_HOLES)]  214.58,9.73 0 bottom
U$97  MOUSE-BITE-12_HOLES  [MOUST-BITE-1-(2_HOLES)]  229.87,9.8 0 bottom
U$98  MOUSE-BITE-12_HOLES  [MOUST-BITE-1-(2_HOLES)]  222.3,9.75 0 bottom
U$99  MOUSE-BITE-12_HOLES  [MOUST-BITE-1-(2_HOLES)]  233.68,50.52 180 bottom
U$100  MOUSE-BITE-12_HOLES  [MOUST-BITE-1-(2_HOLES)]  233.68,34.32 0 bottom
U$101  MOUSE-BITE-12_HOLES  [MOUST-BITE-1-(2_HOLES)]  223.55,33.02 0 bottom
U$102  MOUSE-BITE-12_HOLES  [MOUST-BITE-1-(2_HOLES)]  223.55,51.82 180 bottom
U$103  SEWTAP6  [PETAL-SMALL-2SIDE]  194.44,51.18 227 top
U$104  SEWTAP6  [PETAL-SMALL-2SIDE]  211.96,51.18 133 top
U$105  SEWTAP6  [PETAL-SMALL-2SIDE]  194.44,33.66 313 top
U$106  SEWTAP6  [PETAL-SMALL-2SIDE]  211.96,33.66 47 top
U$107  LOGO-LPLP  [LOGO-LILYPAD]  207.01,42.42 90 bottom
U$108  MOUSE-BITE-12_HOLES  [MOUST-BITE-1-(2_HOLES)]  213.74,52.96 225 bottom
U$109  MOUSE-BITE-12_HOLES  [MOUST-BITE-1-(2_HOLES)]  192.79,31.88 225 bottom
U$110  OSHW-LOGOS  [OSHW-LOGO-S]  194.31,25.91 0 bottom
U$111  MOUSE-BITE-12_HOLES  [MOUST-BITE-1-(2_HOLES)]  14.48,74.35 0 bottom
U$112  MOUSE-BITE-12_HOLES  [MOUST-BITE-1-(2_HOLES)]  22.07,74.35 180 bottom
U$113  MOUSE-BITE-12_HOLES  [MOUST-BITE-1-(2_HOLES)]  29.77,74.35 180 bottom
U$114  MOUSE-BITE-12_HOLES  [MOUST-BITE-1-(2_HOLES)]  44.91,74.35 180 bottom
U$115  MOUSE-BITE-12_HOLES  [MOUST-BITE-1-(2_HOLES)]  37.29,74.35 180 bottom
U$116  MOUSE-BITE-12_HOLES  [MOUST-BITE-1-(2_HOLES)]  14.53,61.04 0 bottom
U$117  MOUSE-BITE-12_HOLES  [MOUST-BITE-1-(2_HOLES)]  22.15,61.06 0 bottom
U$118  MOUSE-BITE-12_HOLES  [MOUST-BITE-1-(2_HOLES)]  29.67,61.04 0 bottom
U$119  MOUSE-BITE-12_HOLES  [MOUST-BITE-1-(2_HOLES)]  44.96,61.11 0 bottom
U$120  MOUSE-BITE-12_HOLES  [MOUST-BITE-1-(2_HOLES)]  37.39,61.06 0 bottom
U$121  MOUSE-BITE-12_HOLES  [MOUST-BITE-1-(2_HOLES)]  48.77,101.83 180 bottom
U$122  MOUSE-BITE-12_HOLES  [MOUST-BITE-1-(2_HOLES)]  48.77,85.62 0 bottom
U$123  MOUSE-BITE-12_HOLES  [MOUST-BITE-1-(2_HOLES)]  38.63,84.33 0 bottom
U$124  MOUSE-BITE-12_HOLES  [MOUST-BITE-1-(2_HOLES)]  38.63,103.12 180 bottom
U$125  SEWTAP6  [PETAL-SMALL-2SIDE]  9.53,102.49 227 top
U$126  SEWTAP6  [PETAL-SMALL-2SIDE]  27.05,102.49 133 top
U$127  SEWTAP6  [PETAL-SMALL-2SIDE]  9.53,84.96 313 top
U$128  SEWTAP6  [PETAL-SMALL-2SIDE]  27.05,84.96 47 top
U$129  LOGO-LPLP  [LOGO-LILYPAD]  22.1,93.73 90 bottom
U$130  MOUSE-BITE-12_HOLES  [MOUST-BITE-1-(2_HOLES)]  28.83,104.27 225 bottom
U$131  MOUSE-BITE-12_HOLES  [MOUST-BITE-1-(2_HOLES)]  7.87,83.19 225 bottom
U$132  OSHW-LOGOS  [OSHW-LOGO-S]  9.4,77.22 0 bottom
U$133  MOUSE-BITE-12_HOLES  [MOUST-BITE-1-(2_HOLES)]  60.71,74.35 0 bottom
U$134  MOUSE-BITE-12_HOLES  [MOUST-BITE-1-(2_HOLES)]  68.3,74.35 180 bottom
U$135  MOUSE-BITE-12_HOLES  [MOUST-BITE-1-(2_HOLES)]  76,74.35 180 bottom
U$136  MOUSE-BITE-12_HOLES  [MOUST-BITE-1-(2_HOLES)]  91.14,74.35 180 bottom
U$137  MOUSE-BITE-12_HOLES  [MOUST-BITE-1-(2_HOLES)]  83.52,74.35 180 bottom
U$138  MOUSE-BITE-12_HOLES  [MOUST-BITE-1-(2_HOLES)]  60.76,61.04 0 bottom
U$139  MOUSE-BITE-12_HOLES  [MOUST-BITE-1-(2_HOLES)]  68.38,61.06 0 bottom
U$140  MOUSE-BITE-12_HOLES  [MOUST-BITE-1-(2_HOLES)]  75.9,61.04 0 bottom
U$141  MOUSE-BITE-12_HOLES  [MOUST-BITE-1-(2_HOLES)]  91.19,61.11 0 bottom
U$142  MOUSE-BITE-12_HOLES  [MOUST-BITE-1-(2_HOLES)]  83.62,61.06 0 bottom
U$143  MOUSE-BITE-12_HOLES  [MOUST-BITE-1-(2_HOLES)]  95,101.83 180 bottom
U$144  MOUSE-BITE-12_HOLES  [MOUST-BITE-1-(2_HOLES)]  95,85.62 0 bottom
U$145  MOUSE-BITE-12_HOLES  [MOUST-BITE-1-(2_HOLES)]  84.86,84.33 0 bottom
U$146  MOUSE-BITE-12_HOLES  [MOUST-BITE-1-(2_HOLES)]  84.86,103.12 180 bottom
U$147  SEWTAP6  [PETAL-SMALL-2SIDE]  55.75,102.49 227 top
U$148  SEWTAP6  [PETAL-SMALL-2SIDE]  73.28,102.49 133 top
U$149  SEWTAP6  [PETAL-SMALL-2SIDE]  55.75,84.96 313 top
U$150  SEWTAP6  [PETAL-SMALL-2SIDE]  73.28,84.96 47 top
U$151  LOGO-LPLP  [LOGO-LILYPAD]  68.33,93.73 90 bottom
U$152  MOUSE-BITE-12_HOLES  [MOUST-BITE-1-(2_HOLES)]  75.06,104.27 225 bottom
U$153  MOUSE-BITE-12_HOLES  [MOUST-BITE-1-(2_HOLES)]  54.1,83.19 225 bottom
U$154  OSHW-LOGOS  [OSHW-LOGO-S]  55.63,77.22 0 bottom
U$155  MOUSE-BITE-12_HOLES  [MOUST-BITE-1-(2_HOLES)]  106.93,74.35 0 bottom
U$156  MOUSE-BITE-12_HOLES  [MOUST-BITE-1-(2_HOLES)]  114.53,74.35 180 bottom
U$157  MOUSE-BITE-12_HOLES  [MOUST-BITE-1-(2_HOLES)]  122.22,74.35 180 bottom
U$158  MOUSE-BITE-12_HOLES  [MOUST-BITE-1-(2_HOLES)]  137.36,74.35 180 bottom
U$159  MOUSE-BITE-12_HOLES  [MOUST-BITE-1-(2_HOLES)]  129.74,74.35 180 bottom
U$160  MOUSE-BITE-12_HOLES  [MOUST-BITE-1-(2_HOLES)]  106.98,61.04 0 bottom
U$161  MOUSE-BITE-12_HOLES  [MOUST-BITE-1-(2_HOLES)]  114.6,61.06 0 bottom
U$162  MOUSE-BITE-12_HOLES  [MOUST-BITE-1-(2_HOLES)]  122.12,61.04 0 bottom
U$163  MOUSE-BITE-12_HOLES  [MOUST-BITE-1-(2_HOLES)]  137.41,61.11 0 bottom
U$164  MOUSE-BITE-12_HOLES  [MOUST-BITE-1-(2_HOLES)]  129.84,61.06 0 bottom
U$165  MOUSE-BITE-12_HOLES  [MOUST-BITE-1-(2_HOLES)]  141.22,101.83 180 bottom
U$166  MOUSE-BITE-12_HOLES  [MOUST-BITE-1-(2_HOLES)]  141.22,85.62 0 bottom
U$167  MOUSE-BITE-12_HOLES  [MOUST-BITE-1-(2_HOLES)]  131.09,84.33 0 bottom
U$168  MOUSE-BITE-12_HOLES  [MOUST-BITE-1-(2_HOLES)]  131.09,103.12 180 bottom
U$169  SEWTAP6  [PETAL-SMALL-2SIDE]  101.98,102.49 227 top
U$170  SEWTAP6  [PETAL-SMALL-2SIDE]  119.51,102.49 133 top
U$171  SEWTAP6  [PETAL-SMALL-2SIDE]  101.98,84.96 313 top
U$172  SEWTAP6  [PETAL-SMALL-2SIDE]  119.51,84.96 47 top
U$173  LOGO-LPLP  [LOGO-LILYPAD]  114.55,93.73 90 bottom
U$174  MOUSE-BITE-12_HOLES  [MOUST-BITE-1-(2_HOLES)]  121.28,104.27 225 bottom
U$175  MOUSE-BITE-12_HOLES  [MOUST-BITE-1-(2_HOLES)]  100.33,83.19 225 bottom
U$176  OSHW-LOGOS  [OSHW-LOGO-S]  101.85,77.22 0 bottom
U$177  MOUSE-BITE-12_HOLES  [MOUST-BITE-1-(2_HOLES)]  153.16,74.35 0 bottom
U$178  MOUSE-BITE-12_HOLES  [MOUST-BITE-1-(2_HOLES)]  160.76,74.35 180 bottom
U$179  MOUSE-BITE-12_HOLES  [MOUST-BITE-1-(2_HOLES)]  168.45,74.35 180 bottom
U$180  MOUSE-BITE-12_HOLES  [MOUST-BITE-1-(2_HOLES)]  183.59,74.35 180 bottom
U$181  MOUSE-BITE-12_HOLES  [MOUST-BITE-1-(2_HOLES)]  175.97,74.35 180 bottom
U$182  MOUSE-BITE-12_HOLES  [MOUST-BITE-1-(2_HOLES)]  153.21,61.04 0 bottom
U$183  MOUSE-BITE-12_HOLES  [MOUST-BITE-1-(2_HOLES)]  160.83,61.06 0 bottom
U$184  MOUSE-BITE-12_HOLES  [MOUST-BITE-1-(2_HOLES)]  168.35,61.04 0 bottom
U$185  MOUSE-BITE-12_HOLES  [MOUST-BITE-1-(2_HOLES)]  183.64,61.11 0 bottom
U$186  MOUSE-BITE-12_HOLES  [MOUST-BITE-1-(2_HOLES)]  176.07,61.06 0 bottom
U$187  MOUSE-BITE-12_HOLES  [MOUST-BITE-1-(2_HOLES)]  187.45,101.83 180 bottom
U$188  MOUSE-BITE-12_HOLES  [MOUST-BITE-1-(2_HOLES)]  187.45,85.62 0 bottom
U$189  MOUSE-BITE-12_HOLES  [MOUST-BITE-1-(2_HOLES)]  177.32,84.33 0 bottom
U$190  MOUSE-BITE-12_HOLES  [MOUST-BITE-1-(2_HOLES)]  177.32,103.12 180 bottom
U$191  SEWTAP6  [PETAL-SMALL-2SIDE]  148.21,102.49 227 top
U$192  SEWTAP6  [PETAL-SMALL-2SIDE]  165.74,102.49 133 top
U$193  SEWTAP6  [PETAL-SMALL-2SIDE]  148.21,84.96 313 top
U$194  SEWTAP6  [PETAL-SMALL-2SIDE]  165.74,84.96 47 top
U$195  LOGO-LPLP  [LOGO-LILYPAD]  160.78,93.73 90 bottom
U$196  MOUSE-BITE-12_HOLES  [MOUST-BITE-1-(2_HOLES)]  167.51,104.27 225 bottom
U$197  MOUSE-BITE-12_HOLES  [MOUST-BITE-1-(2_HOLES)]  146.56,83.19 225 bottom
U$198  OSHW-LOGOS  [OSHW-LOGO-S]  148.08,77.22 0 bottom
U$199  MOUSE-BITE-12_HOLES  [MOUST-BITE-1-(2_HOLES)]  199.39,74.35 0 bottom
U$200  MOUSE-BITE-12_HOLES  [MOUST-BITE-1-(2_HOLES)]  206.98,74.35 180 bottom
U$201  MOUSE-BITE-12_HOLES  [MOUST-BITE-1-(2_HOLES)]  214.68,74.35 180 bottom
U$202  MOUSE-BITE-12_HOLES  [MOUST-BITE-1-(2_HOLES)]  229.82,74.35 180 bottom
U$203  MOUSE-BITE-12_HOLES  [MOUST-BITE-1-(2_HOLES)]  222.2,74.35 180 bottom
U$204  MOUSE-BITE-12_HOLES  [MOUST-BITE-1-(2_HOLES)]  199.44,61.04 0 bottom
U$205  MOUSE-BITE-12_HOLES  [MOUST-BITE-1-(2_HOLES)]  207.06,61.06 0 bottom
U$206  MOUSE-BITE-12_HOLES  [MOUST-BITE-1-(2_HOLES)]  214.58,61.04 0 bottom
U$207  MOUSE-BITE-12_HOLES  [MOUST-BITE-1-(2_HOLES)]  229.87,61.11 0 bottom
U$208  MOUSE-BITE-12_HOLES  [MOUST-BITE-1-(2_HOLES)]  222.3,61.06 0 bottom
U$209  MOUSE-BITE-12_HOLES  [MOUST-BITE-1-(2_HOLES)]  233.68,101.83 180 bottom
U$210  MOUSE-BITE-12_HOLES  [MOUST-BITE-1-(2_HOLES)]  233.68,85.62 0 bottom
U$211  MOUSE-BITE-12_HOLES  [MOUST-BITE-1-(2_HOLES)]  223.55,84.33 0 bottom
U$212  MOUSE-BITE-12_HOLES  [MOUST-BITE-1-(2_HOLES)]  223.55,103.12 180 bottom
U$213  SEWTAP6  [PETAL-SMALL-2SIDE]  194.44,102.49 227 top
U$214  SEWTAP6  [PETAL-SMALL-2SIDE]  211.96,102.49 133 top
U$215  SEWTAP6  [PETAL-SMALL-2SIDE]  194.44,84.96 313 top
U$216  SEWTAP6  [PETAL-SMALL-2SIDE]  211.96,84.96 47 top
U$217  LOGO-LPLP  [LOGO-LILYPAD]  207.01,93.73 90 bottom
U$218  MOUSE-BITE-12_HOLES  [MOUST-BITE-1-(2_HOLES)]  213.74,104.27 225 bottom
U$219  MOUSE-BITE-12_HOLES  [MOUST-BITE-1-(2_HOLES)]  192.79,83.19 225 bottom
U$220  OSHW-LOGOS  [OSHW-LOGO-S]  194.31,77.22 0 bottom

## Library data of the parts
BAT1-BAT10 U$6 U$7 U$9-U$32 U$38-U$40 U$42-U$58 U$64 U$65 U$67-U$80 U$86 U$87 U$89-U$102 U$108 U$109 U$111-U$124 U$130 U$131 U$133-U$146 U$152 U$153 U$155-U$168 U$174 U$175 U$177-U$190 U$196 U$197 U$199-U$212 U$218 U$219 = Testing
BUTTON- BUTTON-1-BUTTON-9 BUTTONS BUTTONS1-BUTTONS9 LED+ LED+1-LED+49 LED- LED-1-LED-49 LOGO1-LOGO70 SLIDEOFF SLIDEOFF1-SLIDEOFF9 SLIDEON SLIDEON1-SLIDEON9 U$1-U$5 U$33-U$37 U$59-U$63 U$81-U$85 U$103-U$107 U$125-U$129 U$147-U$151 U$169-U$173 U$191-U$195 U$213-U$217 = LilyPad-Wearables
E$1 E$8 JP2 JP6 JP9 JP12 JP15 JP18 JP21 JP24 JP27 JP30 U$8 U$41 U$66 U$88 U$110 U$132 U$154 U$176 U$198 U$220 = SparkFun-Aesthetics
E$2 = SparkFun-Retired
JP1 JP3-JP5 JP7 JP8 JP10 JP11 JP13 JP14 JP16 JP17 JP19 JP20 JP22 JP23 JP25 JP26 JP28 JP29 R R1-R49 S1-S20 = SparkFun
LED LED1-LED49 = SparkFun-3-2-07

## Nets
BUTTON: BUTTONS.1 LED1.A LED+1.1 S3.2 U$13.P$1 U$42.P$1
BUTTON1: BUTTONS1.1 LED6.A LED+6.1 S4.2 U$22.P$1 U$30.P$1
BUTTON2: BUTTONS2.1 LED11.A LED+11.1 S6.2 U$48.P$1 U$56.P$1
BUTTON3: BUTTONS3.1 LED16.A LED+16.1 S8.2 U$70.P$1 U$78.P$1
BUTTON4: BUTTONS4.1 LED21.A LED+21.1 S10.2 U$92.P$1 U$100.P$1
BUTTON5: BUTTONS5.1 LED26.A LED+26.1 S12.2 U$114.P$1 U$122.P$1
BUTTON6: BUTTONS6.1 LED31.A LED+31.1 S14.2 U$136.P$1 U$144.P$1
BUTTON7: BUTTONS7.1 LED36.A LED+36.1 S16.2 U$158.P$1 U$166.P$1
BUTTON8: BUTTONS8.1 LED41.A LED+41.1 S18.2 U$180.P$1 U$188.P$1
BUTTON9: BUTTONS9.1 LED46.A LED+46.1 S20.2 U$202.P$1 U$210.P$1
GND [VCC]: BAT1.2 LED-1.1 LED-2.1 LED-3.1 LED-4.1 LED-.1 R8.2 R9.2 R10.2 R11.2 R.2 U$1.1 U$3.1 U$7.P$1 U$15.P$1 U$16.P$1 U$17.P$1 U$18.P$1 U$19.P$1
GND1 [VCC]: BAT2.2 LED-5.1 LED-6.1 LED-7.1 LED-8.1 LED-9.1 R1.2 R2.2 R3.2 R4.2 R5.2 U$24.P$1 U$25.P$1 U$26.P$1 U$27.P$1 U$28.P$1 U$33.1 U$35.1 U$39.P$1
GND2 [VCC]: BAT3.2 LED-10.1 LED-11.1 LED-12.1 LED-13.1 LED-14.1 R6.2 R7.2 R12.2 R13.2 R14.2 U$50.P$1 U$51.P$1 U$52.P$1 U$53.P$1 U$54.P$1 U$59.1 U$61.1 U$65.P$1
GND3 [VCC]: BAT4.2 LED-15.1 LED-16.1 LED-17.1 LED-18.1 LED-19.1 R15.2 R16.2 R17.2 R18.2 R19.2 U$72.P$1 U$73.P$1 U$74.P$1 U$75.P$1 U$76.P$1 U$81.1 U$83.1 U$87.P$1
GND4 [VCC]: BAT5.2 LED-20.1 LED-21.1 LED-22.1 LED-23.1 LED-24.1 R20.2 R21.2 R22.2 R23.2 R24.2 U$94.P$1 U$95.P$1 U$96.P$1 U$97.P$1 U$98.P$1 U$103.1 U$105.1 U$109.P$1
GND5 [VCC]: BAT6.2 LED-25.1 LED-26.1 LED-27.1 LED-28.1 LED-29.1 R25.2 R26.2 R27.2 R28.2 R29.2 U$116.P$1 U$117.P$1 U$118.P$1 U$119.P$1 U$120.P$1 U$125.1 U$127.1 U$131.P$1
GND6 [VCC]: BAT7.2 LED-30.1 LED-31.1 LED-32.1 LED-33.1 LED-34.1 R30.2 R31.2 R32.2 R33.2 R34.2 U$138.P$1 U$139.P$1 U$140.P$1 U$141.P$1 U$142.P$1 U$147.1 U$149.1 U$153.P$1
GND7 [VCC]: BAT8.2 LED-35.1 LED-36.1 LED-37.1 LED-38.1 LED-39.1 R35.2 R36.2 R37.2 R38.2 R39.2 U$160.P$1 U$161.P$1 U$162.P$1 U$163.P$1 U$164.P$1 U$169.1 U$171.1 U$175.P$1
GND8 [VCC]: BAT9.2 LED-40.1 LED-41.1 LED-42.1 LED-43.1 LED-44.1 R40.2 R41.2 R42.2 R43.2 R44.2 U$182.P$1 U$183.P$1 U$184.P$1 U$185.P$1 U$186.P$1 U$191.1 U$193.1 U$197.P$1
GND9 [VCC]: BAT10.2 LED-45.1 LED-46.1 LED-47.1 LED-48.1 LED-49.1 R45.2 R46.2 R47.2 R48.2 R49.2 U$204.P$1 U$205.P$1 U$206.P$1 U$207.P$1 U$208.P$1 U$213.1 U$215.1 U$219.P$1
N$1: LED5.C R1.1
N$2: LED6.C R2.1
N$3: LED7.C R3.1
N$4: LED8.C R4.1
N$5: LED9.C R5.1
N$6: LED10.C R6.1
N$7: LED11.C R7.1
N$8: LED12.C R12.1
N$9: LED13.C R13.1
N$10: LED14.C R14.1
N$11: LED15.C R15.1
N$12: LED16.C R16.1
N$13: LED17.C R17.1
N$14: LED18.C R18.1
N$15: LED19.C R19.1
N$16: LED20.C R20.1
N$17: LED21.C R21.1
N$18: LED.C R.1
N$19: LED22.C R22.1
N$20: LED23.C R23.1
N$21: LED1.C R8.1
N$22: LED24.C R24.1
N$23: LED25.C R25.1
N$24: LED2.C R9.1
N$25: LED26.C R26.1
N$26: LED27.C R27.1
N$27: LED3.C R10.1
N$28: LED28.C R28.1
N$29: LED29.C R29.1
N$30: LED4.C R11.1
N$31: LED30.C R30.1
N$32: LED31.C R31.1
N$33: LED32.C R32.1
N$34: LED33.C R33.1
N$35: LED34.C R34.1
N$36: LED35.C R35.1
N$37: LED36.C R36.1
N$38: LED37.C R37.1
N$39: LED38.C R38.1
N$40: LED39.C R39.1
N$41: LED40.C R40.1
N$42: LED41.C R41.1
N$43: LED42.C R42.1
N$44: LED43.C R43.1
N$45: LED44.C R44.1
N$46: LED45.C R45.1
N$47: LED46.C R46.1
N$48: LED47.C R47.1
N$49: LED48.C R48.1
N$50: LED49.C R49.1
SINK1: S2.4
SINK2: S2.1
SINK3: S1.4
SINK4: S1.1
SINK5: S5.4
SINK6: S5.1
SINK7: S7.4
SINK8: S7.1
SINK9: S9.4
SINK10: S9.1
SINK11: S11.4
SINK12: S11.1
SINK13: S13.4
SINK14: S13.1
SINK15: S15.4
SINK16: S15.1
SINK17: S17.4
SINK18: S17.1
SINK19: S19.4
SINK20: S19.1
SWITCH: LED2.A LED3.A LED4.A LED+2.1 LED+3.1 LED+4.1 LED+.1 LED.A S2.2 S2.5 SLIDEOFF.1 U$10.P$1 U$11.P$1 U$12.P$1 U$14.P$1 U$44.P$1
SWITCH1: LED5.A LED7.A LED8.A LED9.A LED+5.1 LED+7.1 LED+8.1 LED+9.1 S1.2 S1.5 SLIDEOFF1.1 U$9.P$1 U$20.P$1 U$21.P$1 U$23.P$1 U$31.P$1
SWITCH2: LED10.A LED12.A LED13.A LED14.A LED+10.1 LED+12.1 LED+13.1 LED+14.1 S5.2 S5.5 SLIDEOFF2.1 U$43.P$1 U$45.P$1 U$47.P$1 U$49.P$1 U$57.P$1
SWITCH3: LED15.A LED17.A LED18.A LED19.A LED+15.1 LED+17.1 LED+18.1 LED+19.1 S7.2 S7.5 SLIDEOFF3.1 U$67.P$1 U$68.P$1 U$69.P$1 U$71.P$1 U$79.P$1
SWITCH4: LED20.A LED22.A LED23.A LED24.A LED+20.1 LED+22.1 LED+23.1 LED+24.1 S9.2 S9.5 SLIDEOFF4.1 U$89.P$1 U$90.P$1 U$91.P$1 U$93.P$1 U$101.P$1
SWITCH5: LED25.A LED27.A LED28.A LED29.A LED+25.1 LED+27.1 LED+28.1 LED+29.1 S11.2 S11.5 SLIDEOFF5.1 U$111.P$1 U$112.P$1 U$113.P$1 U$115.P$1 U$123.P$1
SWITCH6: LED30.A LED32.A LED33.A LED34.A LED+30.1 LED+32.1 LED+33.1 LED+34.1 S13.2 S13.5 SLIDEOFF6.1 U$133.P$1 U$134.P$1 U$135.P$1 U$137.P$1 U$145.P$1
SWITCH7: LED35.A LED37.A LED38.A LED39.A LED+35.1 LED+37.1 LED+38.1 LED+39.1 S15.2 S15.5 SLIDEOFF7.1 U$155.P$1 U$156.P$1 U$157.P$1 U$159.P$1 U$167.P$1
SWITCH8: LED40.A LED42.A LED43.A LED44.A LED+40.1 LED+42.1 LED+43.1 LED+44.1 S17.2 S17.5 SLIDEOFF8.1 U$177.P$1 U$178.P$1 U$179.P$1 U$181.P$1 U$189.P$1
SWITCH9: LED45.A LED47.A LED48.A LED49.A LED+45.1 LED+47.1 LED+48.1 LED+49.1 S19.2 S19.5 SLIDEOFF9.1 U$199.P$1 U$200.P$1 U$201.P$1 U$203.P$1 U$211.P$1
VCC: BAT1.1 BUTTON-.1 S2.3 S2.6 S3.4 SLIDEON.1 U$2.1 U$4.1 U$6.P$1 U$40.P$1 U$46.P$1
VCC1: BAT2.1 BUTTON-1.1 S1.3 S1.6 S4.4 SLIDEON1.1 U$29.P$1 U$32.P$1 U$34.1 U$36.1 U$38.P$1
VCC2: BAT3.1 BUTTON-2.1 S5.3 S5.6 S6.4 SLIDEON2.1 U$55.P$1 U$58.P$1 U$60.1 U$62.1 U$64.P$1
VCC3: BAT4.1 BUTTON-3.1 S7.3 S7.6 S8.4 SLIDEON3.1 U$77.P$1 U$80.P$1 U$82.1 U$84.1 U$86.P$1
VCC4: BAT5.1 BUTTON-4.1 S9.3 S9.6 S10.4 SLIDEON4.1 U$99.P$1 U$102.P$1 U$104.1 U$106.1 U$108.P$1
VCC5: BAT6.1 BUTTON-5.1 S11.3 S11.6 S12.4 SLIDEON5.1 U$121.P$1 U$124.P$1 U$126.1 U$128.1 U$130.P$1
VCC6: BAT7.1 BUTTON-6.1 S13.3 S13.6 S14.4 SLIDEON6.1 U$143.P$1 U$146.P$1 U$148.1 U$150.1 U$152.P$1
VCC7: BAT8.1 BUTTON-7.1 S15.3 S15.6 S16.4 SLIDEON7.1 U$165.P$1 U$168.P$1 U$170.1 U$172.1 U$174.P$1
VCC8: BAT9.1 BUTTON-8.1 S17.3 S17.6 S18.4 SLIDEON8.1 U$187.P$1 U$190.P$1 U$192.1 U$194.1 U$196.P$1
VCC9: BAT10.1 BUTTON-9.1 S19.3 S19.6 S20.4 SLIDEON9.1 U$209.P$1 U$212.P$1 U$214.1 U$216.1 U$218.P$1